# Allegro board project5_3.brd
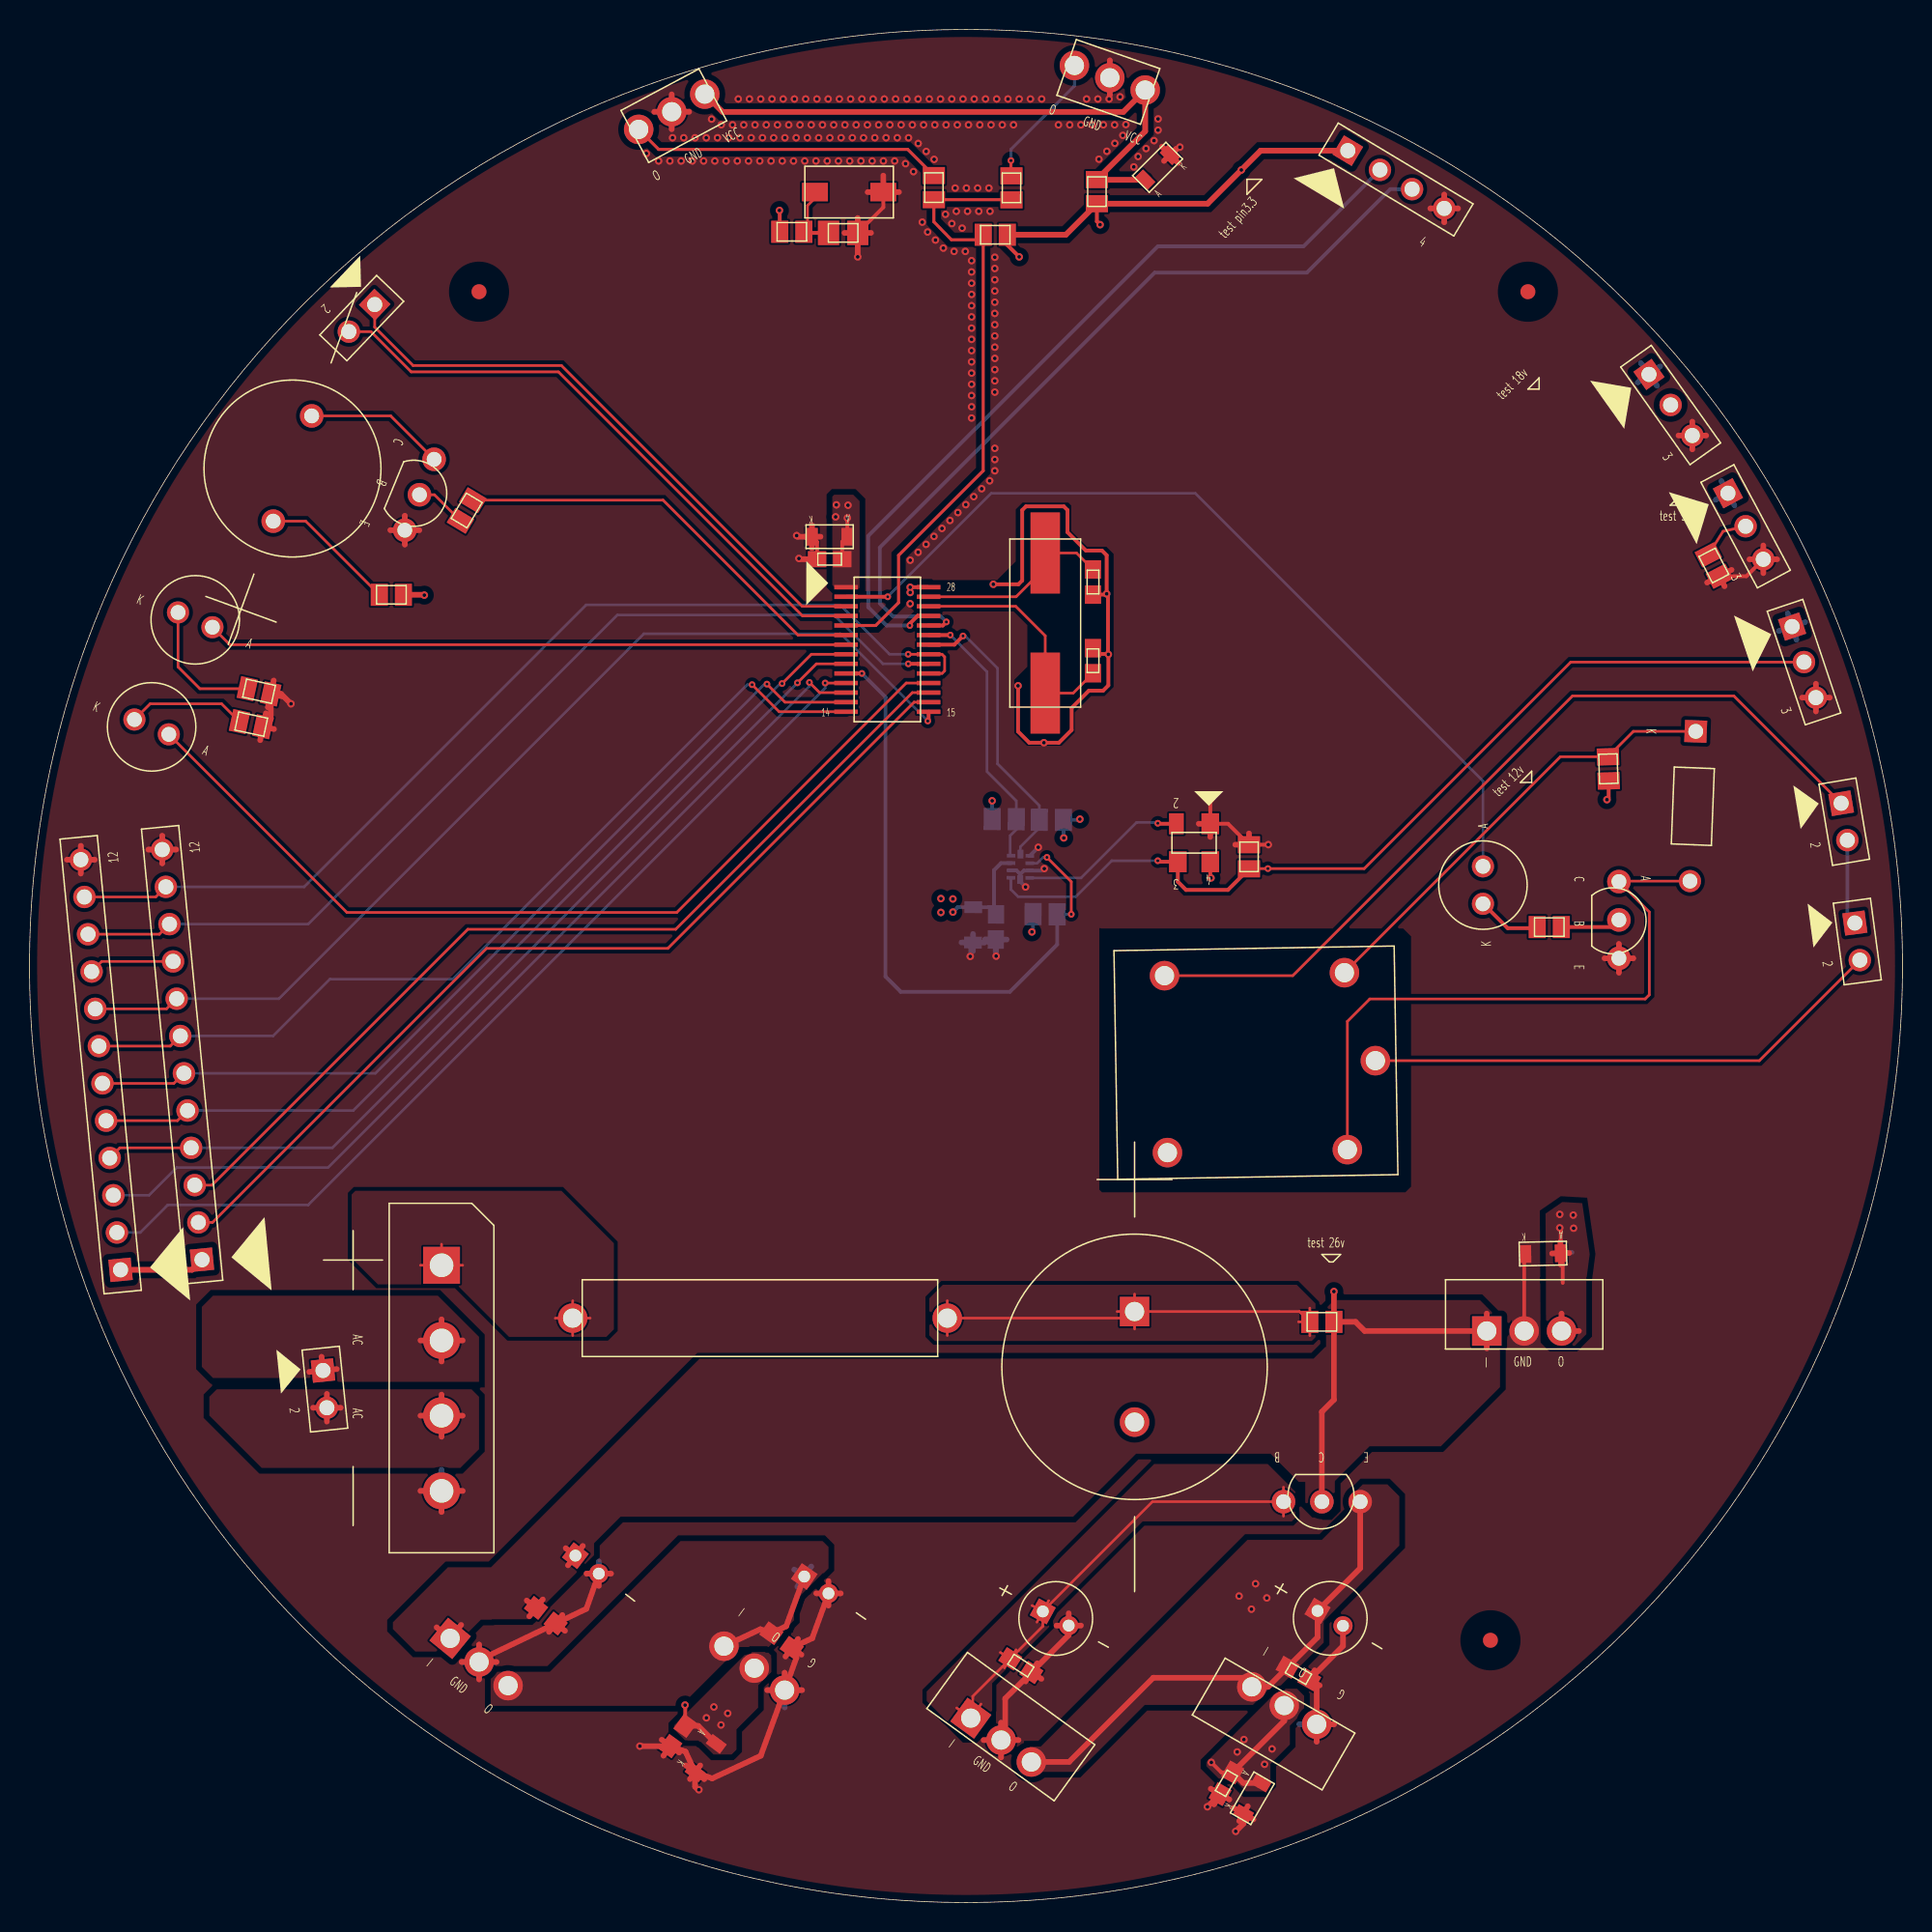
[diagram p0: board, top side]
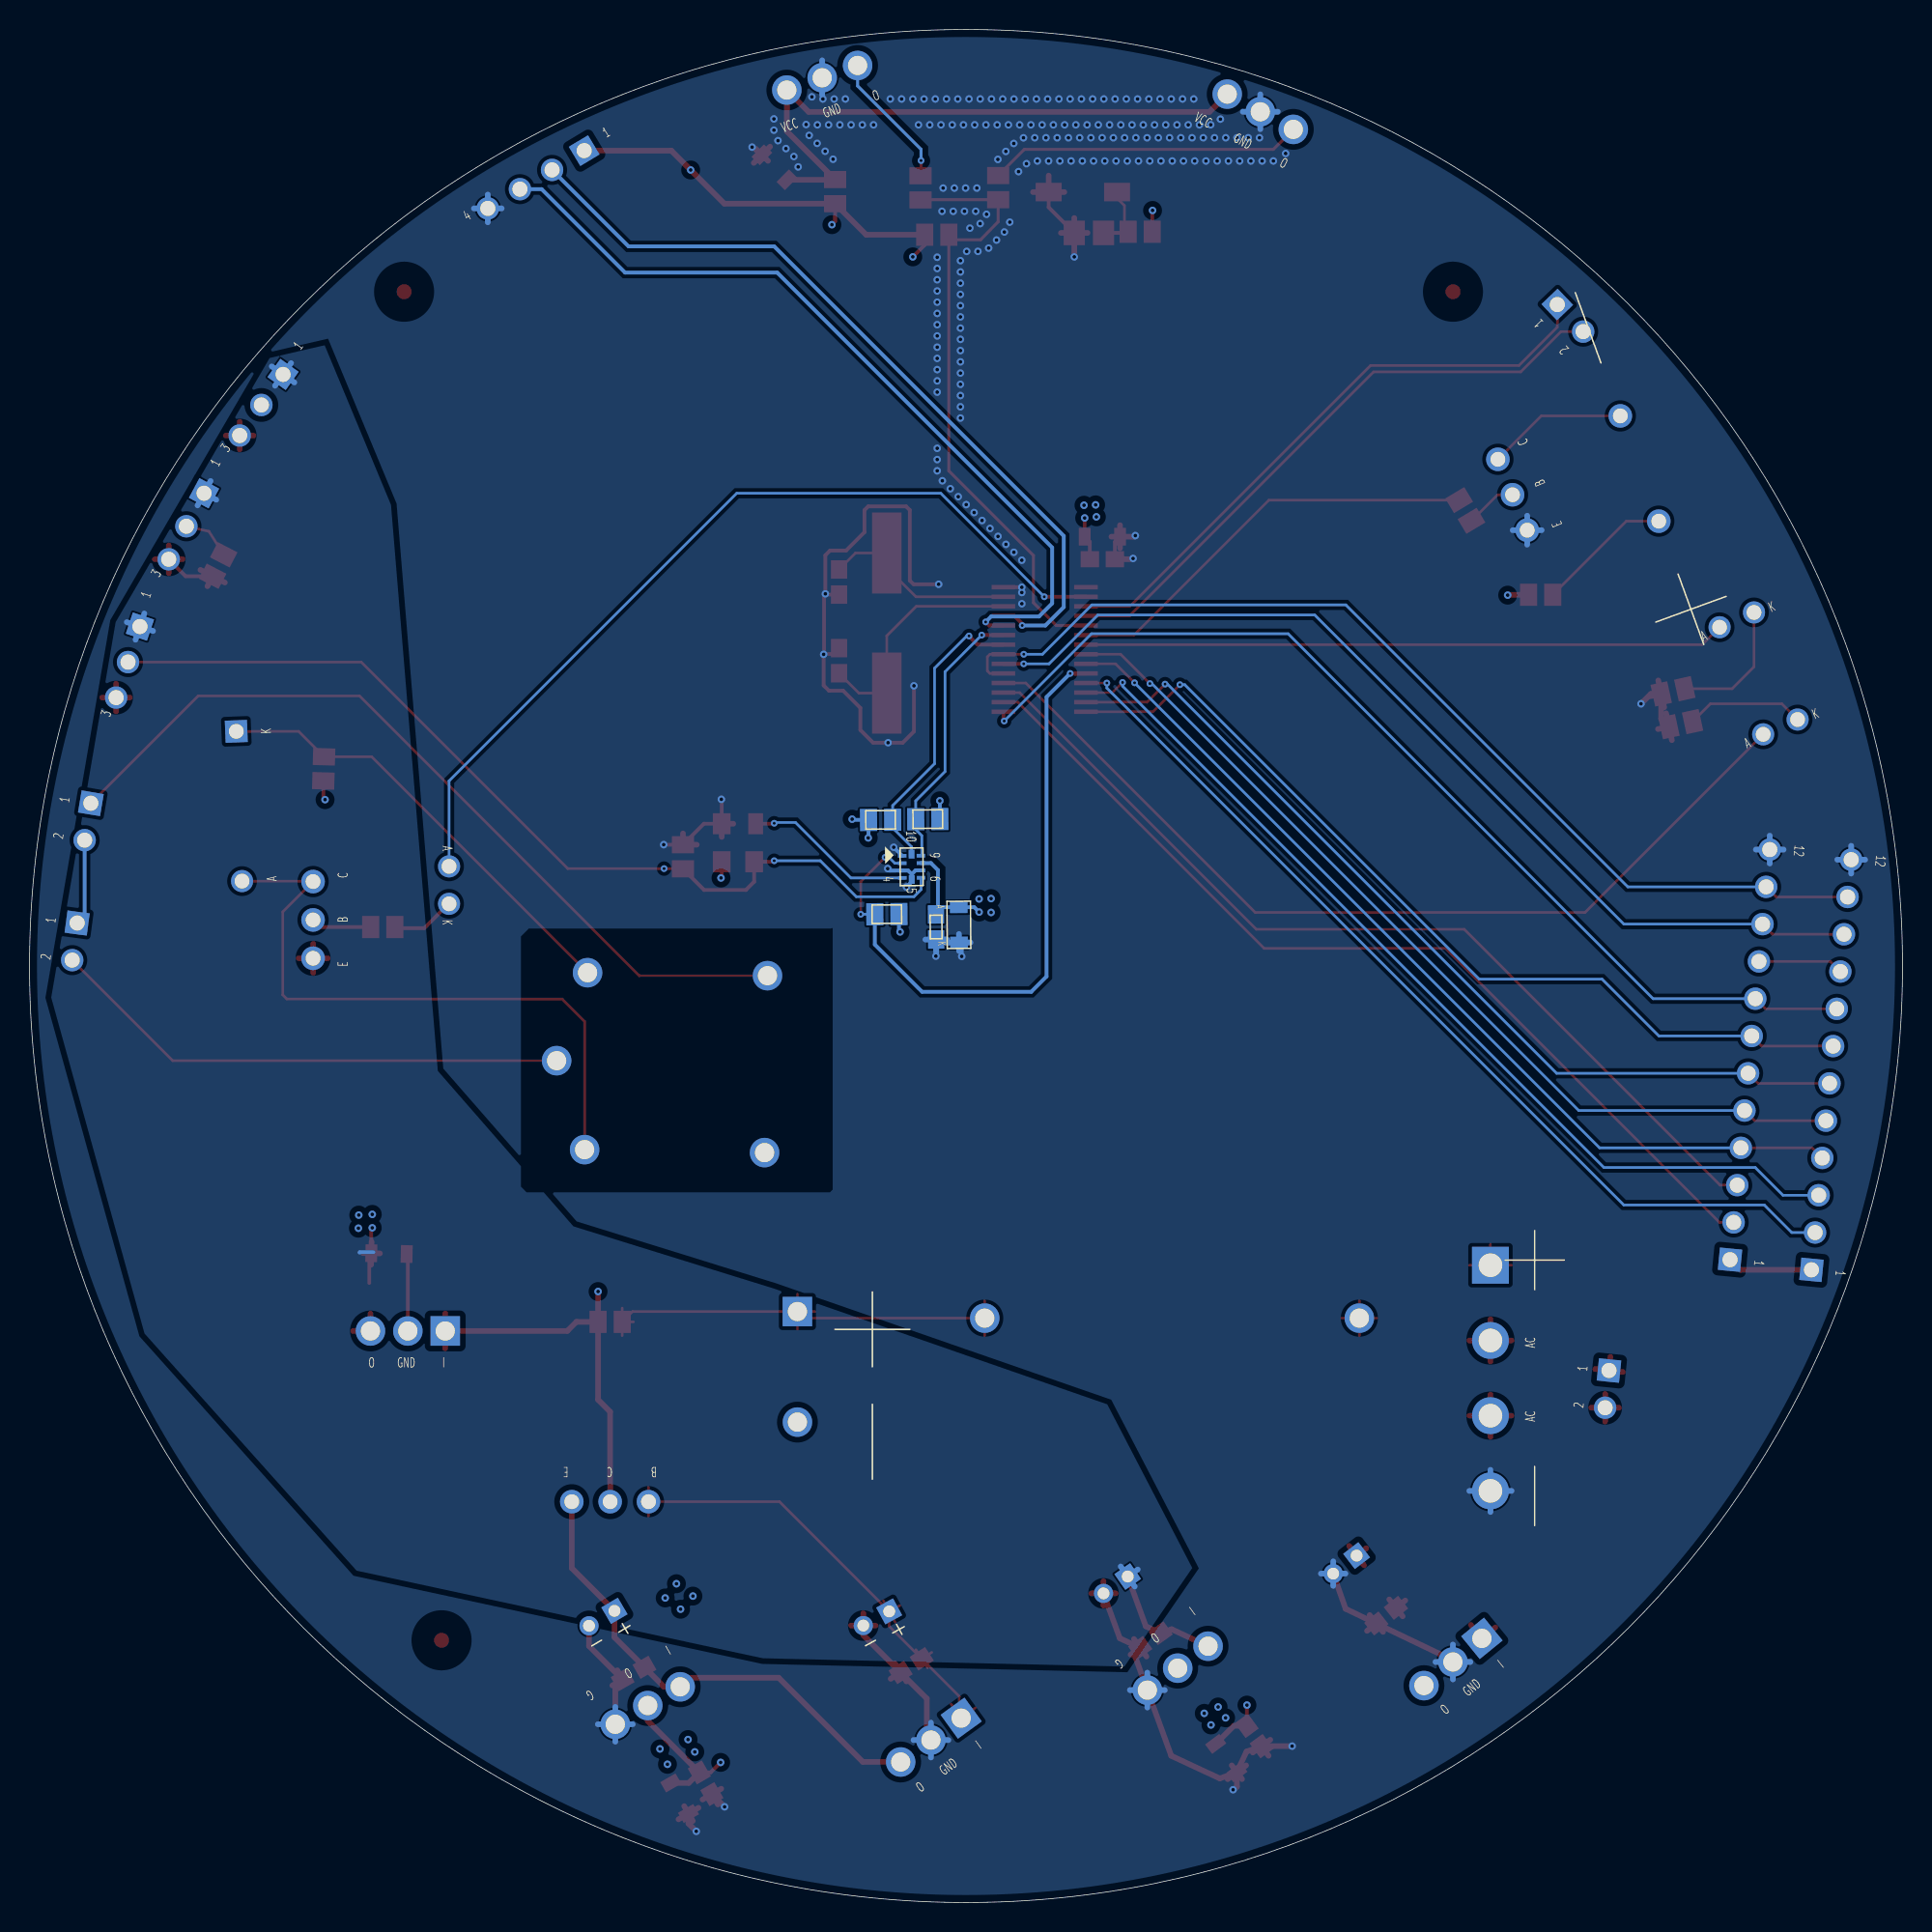
[diagram p1: board, bottom side, seen from below]

Outline 127 x 127 mm; copper layers: TOP, L2_GND, L3_SIG1-PWR, L4_SIG2-PWR, L5_GND, BOTTOM. Coordinates in mm from the lower left corner of the outline.
Outline path: 0,63.5 arc(63.5,127) 127,63.5 arc(63.5,0) 0,63.5

## Design rules (mm)
constraint set DEFAULT: min track width 0.127
net group PWR: nets N04825
net group SENSOR: nets IREMOTE N04873 N04910
net group SIGNAL: nets AIN0 AIN2 ALERT BUZZ LEDA1 LEDA2 LEDB1 LEDB2 N01192 N01643 N01661 N06312 N09730 N09734 N11094 N11141 N11148 N12424 N12443 N12670 N12674 N12827 N12831 N12862 P1.5 P2.5 RELAY RESET RXD SEG_A SEG_B SEG_C SEG_D SEG_E SEG_F SEG_G SEG_H TEST TXD XIN XOUT

## Placement (name value [footprint] x y rotation side)
C1  10uF/16V  [CAP_TANTA_10UF_16V]  63.98 66.29 269.6 bottom
C2  100nF/16V  [C0603]  72.11 84.2 90 top
C3  10uF/16V  [CAP_TANTA_10UF_16V]  54.25 92.61 180 top
C4  100nF/16V  [C0603]  65.53 66.15 269.6 bottom
C5  1nF  [C0805]  55.17 113.21 180 top
C6  100nF/16V  [C0603]  54.25 91.08 180 top
C7  100nF/16V  [C0603]  72.11 89.53 270 top
C8  4.7uF/16V  [CAP_TANTA_10UF_16V]  76.49 117.66 45 top
C9  10uF/16V  [CAP_TANTA_10UF_16V]  102.62 44 181.3 top
C10  10uF/50V  [CAPACITOR_10UF_50V_DIP]  69.59 19.26 331.3 top
C11  100nF/50V  [C0603]  67.22 16.06 327.2 top
C12  10uF/50V  [CAPACITOR_10UF_50V_DIP]  88.2 19.27 329.5 top
C13  100nF/25V  [C0603]  86.04 15.53 330.4 top
C14  10uF/16V  [CAP_TANTA_10UF_16V]  82.92 7.07 240 top
C15  100nF/16V  [C0603]  81.16 8.08 240 top
C16  3300uF/50V  [CAPACITOR_3300UF_50V]  74.93 36.32 270 top
C17  10uF/50V  [CAPACITOR_10UF_50V_DIP]  37.81 22.91 322.4 top
C18  100nF/50V  [C0603]  35.01 19.45 321.5 top
C19  10uF/50V  [CAPACITOR_10UF_50V_DIP]  53.36 21.53 325.1 top
C20  100nF/25V  [C0603]  50.99 17.77 324.5 top
C21  10uF/16V  [CAP_TANTA_10UF_16V]  45.85 9.79 233.2 top
C22  100nF/16V  [C0603]  43.96 11.29 233.9 top
D1  LED  [LED_5MM]  11.24 86.97 336.7 top
D2  LED  [LED_5MM]  8.28 79.71 336.7 top
D3  LED  [LED_5MM]  98.55 68.99 90 top
D4  DIODE  [DIODE_1N4007]  112.78 74.33 267.8 top
D5  KBU1010  [KBU1010G]  27.94 35.56 270 top
F1  FUSE/2.5A  [FUSE2_5A]  49.53 39.62 0 top
FIDUCIAL*  -  [unnamed]  99.06 17.78 0 top
FIDUCIAL*#2  -  [unnamed]  30.48 109.22 0 top
FIDUCIAL*#3  -  [unnamed]  101.6 109.22 0 top
IC1  -  [TSOP1838]  43.69 121.16 28.1 top
IC2  -  [TSOP1838]  73.15 123.44 340.8 top
J1  SPYBIWIRE  [PIN_HEADER_DIP4]  92.66 116.83 329.1 top
J2  POWER  [PIN_HEADER_DIP3]  111.28 101.54 305.4 top
J3  UART  [PIN_HEADER_DIP2]  22.53 107.43 226.3 top
J4  220V-AC  [PIN_HEADER_DIP2]  123.94 65.16 277.6 top
J5  DISPLAY_PORT_1  [PIN_HEADER_DIP12]  4.83 56.8 95.5 top
J6  DISPLAY_PORT_2  [PIN_HEADER_DIP12]  10.35 57.49 95.5 top
J7  UM-18-LEFT  [PIN_HEADER_DIP3]  116.36 93.32 298.1 top
J8  UM-18-RIGHT  [PIN_HEADER_DIP3]  120.32 84.11 288.5 top
J9  220V-AC  [PIN_HEADER_DIP2]  123.05 73.28 279.5 top
J10  18V-AC  [PIN_HEADER_DIP2]  20.03 34.81 275.9 top
LS1  RELAY SPDT  [RL_10A_5V]  83.16 56.95 180.9 top
LS2  -  [SPEAKER]  17.83 97.23 69.9 top
Q1  -  [2N2222]  26.44 95.45 247.5 top
Q2  -  [2N2222]  107.77 66.62 270 top
Q3  PNP BCE  [KSA1013]  87.63 27.18 180 top
R1  47K  [R0805]  51.69 113.28 0 top
R2  10K  [R0805]  66.09 73.46 359.6 bottom
R3  10K  [R0805]  69.29 73.41 179.6 bottom
R4  330R  [R0805]  72.37 116.01 90 top
R5  10K  [R0805]  68.86 67.01 359.6 bottom
R6  10K  [R0805]  65.48 113.08 180 top
R7  0R  [R0805]  66.58 116.26 90 top
R8  330R  [R0805]  15.56 82.13 347.6 top
R9  0R  [R0805]  61.32 116.28 90 top
R10  330R  [R0805]  15.03 79.9 347.8 top
R11  220R  [R0805]  24.54 88.67 180 top
R12  220R  [R0805]  107.05 76.87 271.7 top
R13  200K,1/4W  [R0805]  114.21 90.66 297.4 top
R14  10K  [R0805]  82.69 70.91 90 top
R15  2K2,1/4W  [R0805]  29.64 94.39 239.2 top
R16  330R  [R0805]  103.05 66.14 0 top
R17  2K2,1/4W  [R0805]  87.63 39.37 0 top
SW1  button  [BUTTON_2PIN]  55.58 115.98 0 top
U1  MSP430G2553_28P  [MSP430G2553_28PIN]  58.17 84.96 0 top
U2  ADS1115  [R_PQFP_N10]  67.19 70.23 269.6 bottom
U3  -  [PRTR5V0U2X]  78.96 71.86 180 top
U4  LM7805  [LM78XX]  101.35 39.88 0 top
U5  LM7812  [LM78XX]  66.54 11.93 324.1 top
U6  LM781086  [KTT0003B]  84.36 12.1 150 top
U7  LM7818  [LM78XX]  31.2 17.18 320.8 top
U8  LM781086  [KTT0003B]  48.3 14.72 144.1 top
Y1  -  [CRYSTAL]  68.87 86.75 270 top

## Library data of the parts
C1 C3 C8 = CAP: room: MCU
C2 C4-C7 = CAP NP: room: MCU
C9 C10 C12 C14 C16 C17 C19 C21 = CAP: room: POWER
C11 C13 C15 C18 C20 C22 = CAP NP: room: POWER
D1 D2 = LED: room: MCU
D3 = LED: room: OUTPUT
D4 = DIODE: room: OUTPUT
D5 = KBU1010: room: POWER
F1 = FUSE: room: POWER
IC1 IC2 = TSOP1838: room: MCU
J1 = HEADER 4: room: MCU
J2 = HEADER 3: room: MCU
J3 = HEADER 2: room: MCU
J4 J9 = HEADER 2: room: OUTPUT
J5 J6 = HEADER 12: room: OUTPUT
J7 J8 = HEADER 3: room: OUTPUT
J10 = HEADER 2: room: POWER
LS1 = RELAY SPDT: room: OUTPUT
LS2 = SPEAKER: room: OUTPUT
Q1 Q2 = NPN BCE: room: OUTPUT
Q3 = PNP BCE: room: POWER
R1-R10 = RESISTOR: room: MCU
R11-R16 = RESISTOR: room: OUTPUT
R17 = RESISTOR: room: POWER
SW1 = button: room: MCU
U1 = MSP430G2553_28P: room: MCU
U2 = ADS1115: room: MCU
U3 = PRTR5V0U2X: room: OUTPUT
U4-U8 = LM78XX: room: POWER
Y1 = CRYSTAL: room: MCU

## Footprints (pads in the part's own frame, mm; a bottom-side part is the same pattern mirrored in y, then rotated)
2N2222
  round 1.6 hole 1.001: 1(0,0) 2(-2.601,0) 3(2.601,0)
BUTTON_2PIN
  rect 1.763x1.255 smd: 1(-2.319,0) 2(2.319,0)
C0603
  rect 1.25x1.1 smd: 1(-0.851,0) 2(0.851,0)
C0805
  rect 1.44x1.661 smd: 1(-0.991,0) 2(0.991,0)
CAP_TANTA_10UF_16V
  rect 0.8x1.199 smd: 1(-1.199,0) 2(1.199,0)
CAPACITOR_10UF_50V_DIP
  rect 1.3x1.3 hole 0.8: 1(-1.001,0)
  round 1.3 hole 0.8: 2(1.001,0)
CAPACITOR_3300UF_50V
  rect 1.999x1.999 hole 1.3: 1(-3.749,0)
  round 1.999 hole 1.3: 2(3.749,0)
CRYSTAL
  rect 5.499x1.999 smd: 1(-4.75,0) 2(4.75,0)
DIODE_1N4007
  rect 1.501x1.501 hole 1.001: 1(-5.08,0)
  round 1.501 hole 1.001: 2(5.08,0)
FUSE2_5A
  round 1.999 hole 1.3: 1(-12.7,0) 2(12.7,0)
KBU1010G
  rect 2.499x2.499 hole 1.6: 1(-7.65,0)
  round 2.499 hole 1.6: 2(-2.55,0) 3(2.55,0) 4(7.65,0)
KSA1013
  round 1.6 hole 1.001: 1(2.601,0) 2(0,0) 3(-2.601,0)
KTT0003B
  round 1.999 hole 1.3: 1(2.54,-1.445) 2(-2.54,-1.445) 3(0,-1.445)
LED_5MM
  round 1.501 hole 1.001: 1(-1.27,0) 2(1.27,0)
LM78XX
  rect 1.999x1.999 hole 1.3: 1(-2.535,-1.125)
  round 1.999 hole 1.3: 2(0,-1.125) 3(2.535,-1.125)
MSP430G2553_28PIN
  rect 1.6x0.3 smd: 1(-2.799,4.224) 2(-2.799,3.574) 3(-2.799,2.926) 4(-2.799,2.276) 5(-2.799,1.626) 6(-2.799,0.975) 7(-2.799,0.325) 8(-2.799,-0.325) 9(-2.799,-0.975) 10(-2.799,-1.626) 11(-2.799,-2.276) 12(-2.799,-2.926) 13(-2.799,-3.574) 14(-2.799,-4.224) 15(2.799,-4.224) 16(2.799,-3.574) 17(2.799,-2.926) 18(2.799,-2.276) 19(2.799,-1.626) 20(2.799,-0.975) 21(2.799,-0.325) 22(2.799,0.325) 23(2.799,0.975) 24(2.799,1.626) 25(2.799,2.276) 26(2.799,2.926) 27(2.799,3.574) 28(2.799,4.224)
PIN_HEADER_DIP2
  rect 1.519x1.519 hole 1.021: 1(-1.27,0)
  round 1.519 hole 1.021: 2(1.27,0)
PIN_HEADER_DIP3
  rect 1.519x1.519 hole 1.021: 1(-2.54,0)
  round 1.519 hole 1.021: 2(0,0) 3(2.54,0)
PIN_HEADER_DIP4
  rect 1.519x1.519 hole 1.021: 1(-3.81,0)
  round 1.519 hole 1.021: 2(-1.27,0) 3(1.27,0) 4(3.81,0)
PIN_HEADER_DIP12
  rect 1.519x1.519 hole 1.021: 1(-13.97,0)
  round 1.519 hole 1.021: 2(-11.43,0) 3(-8.89,0) 4(-6.35,0) 5(-3.81,0) 6(-1.27,0) 7(1.27,0) 8(3.81,0) 9(6.35,0) 10(8.89,0) 11(11.43,0) 12(13.97,0)
PRTR5V0U2X
  rect 1.199x1.425 smd: 1(-1.1,-1.288) 3(1.1,1.288) 4(-1.1,1.288)
  rect 1.001x1.425 smd: 2(1.199,-1.288)
R0805
  rect 1.161x1.504 smd: 1(-0.818,0) 2(0.818,0)
R_PQFP_N10
  rect 0.249x0.579 smd: 1(-0.749,-0.635) 2(-0.249,-0.635) 3(0.249,-0.635) 4(0.749,-0.635) 6(0.749,0.635) 7(0.249,0.635) 8(-0.249,0.635) 9(-0.749,0.635)
  rect 0.599x0.399 smd: 5(0.861,0) 10(-0.861,0)
RL_10A_5V
  round 1.999 hole 1.3: 1(-6.101,-5.999) 2(-6.101,5.999) 3(-8.1,0) 4(6.101,-5.999) 5(6.101,5.999)
SPEAKER
  round 1.6 hole 1.001: 1(-3.8,0) 2(3.8,0)
TSOP1838
  round 1.999 hole 1.3: 1(2.54,0.3) 2(0,0.3) 3(-2.54,0.3)
unnamed
  round 1.016 smd: (0,0)

## Nets
+3.3V: C1.1 C3.1 C4.1 C6.1 C14.1 C15.1 C21.1 C22.1 J1.1 R1.1 R2.1 R3.1 R4.1 R5.1 R6.1 U1.1 U2.8(VDD) U3.4(VCC) U6.3(VOUT) U8.3(VOUT)
+5V: C9.1 J2.2 U4.3(VOUT)
+12V: C12.1 C13.1 J5.1 J6.1 Q3.3(E) R11.1 R12.2 U5.3(VOUT) U6.1
+18V: C19.1 C20.1 J2.1 J7.1 J8.1 U7.3(VOUT) U8.1
+26V: C17.1 C18.1 Q3.2 R17.2 U4.1 U7.1
GND: C1.2 C2.2 C3.2 C4.2 C5.1 C6.2 C7.2 C8.2 C9.2 C10.2 C11.2 C12.2 C13.2 C14.2 C15.2 C16.2 C17.2 C18.2 C19.2 C20.2 C21.2 C22.2 D5.4 IC1.2 IC2.2 J1.4 J2.3 J5.12 J6.12 J7.3 J8.3 Q1.3(E) Q2.3(E) R8.2 R10.2 R13.2 R14.2 SW1.2 U1.28 U2.1 U2.3 U2.5 U2.7 U3.1 U4.2 U5.2 U6.2 U7.2 U8.2
AIN0: U2.4 U3.2
AIN2: J8.2 R14.1 U2.6 U3.3
ALERT: R5.2 U1.10 U2.2
BUZZ: R15.1 U1.6
IREMOTE: R6.2 R7.1 R9.1 U1.5
LEDA1: J5.2 U1.11
LEDA2: J5.3 U1.12
LEDB1: J6.2 U1.16
LEDB2: J6.3 U1.17
P1.5: D1.2 U1.7
P2.5: D2.2 U1.18
RELAY: D3.2 U1.2
RESET: J1.3 U1.24
RXD: J3.1 U1.3
SEG_A: J5.4 J6.4 U1.9
SEG_B: J5.5 J6.5 U1.8
SEG_C: J5.6 J6.6 U1.13
SEG_D: J5.7 J6.7 U1.14
SEG_E: J5.8 J6.8 U1.15
SEG_F: J5.9 J6.9
SEG_G: J5.10 J6.10 U1.20
SEG_H: J5.11 J6.11 U1.19 U1.21
TEST: J1.2 U1.25
TXD: J3.2 U1.4
XIN: C7.1 U1.27 Y1.1
XOUT: C2.1 U1.26(XOUT) Y1.2
N01192: C5.2 R1.2 SW1.1
N01643: R2.2 U1.23 U2.9
N01661: R3.2 U1.22 U2.10
N04825: C8.1 IC1.1(VCC) IC2.1(VCC) R4.2
N04873: IC2.3 R7.2
N04910: IC1.3 R9.2
N06312: J7.2 R13.1
N09730: D1.1(CATHODE) R8.1
N09734: D2.1(CATHODE) R10.1
N11094: LS2.1 R11.2
N11141: LS2.2 Q1.2
N11148: Q1.1 R15.2
N12424: D3.1(CATHODE) R16.1
N12443: Q2.1 R16.2
N12670: D4.2 LS1.2 Q2.2
N12674: D4.1(K) LS1.1 R12.1
N12827: J4.1 J9.2
N12831: J9.1 LS1.4(NO)
N12862: J4.2 LS1.3
N19176: D5.2(AC) J10.1
N19183: D5.3 J10.2
N19215: D5.1 F1.1
N21283: C16.1 F1.2 R17.1
N21515: C10.1 C11.1 Q3.1 U5.1

Pads without a net: LS1 5

## Via types
v1: diameter 0.457, hole 0.203, TOP to BOTTOM, 21 vias
v2: diameter 0.508, hole 0.254, TOP to BOTTOM, 248 vias

## Routing (per net, layer and track width the routed paths; a pad name or vN(x,y) marks a point on that pad's centre or on a via; arc(x,y) is an arc through that point)
+3.3V: length 63.4
  TOP w0.254: v2(80.14,9.5) 80.82,8.82 81.58,8.82 ; v2(72.59,113.77) 72.37,113.99 R4.1 ; v2(50.85,114.73) 50.87,114.71 R1.1 ; v2(80.11,69.47) 80.06,69.52 U3.4 ; R6.1 66.3,112.39 v2(67.11,111.58) ; 44.46,11.98 44.46,13.37 v2(44.45,13.39) ; v2(55.45,93.88) C3.1 55.11,92.26 C6.1
  TOP w0.381: 46.57,10.75 45.34,11.98 44.46,11.98 ; U6.3 85.08,12.32 81.58,8.82 82.3,8.11 C14.1 ; R6.1 70.27,113.08 R4.1 79.88,115.19 v2(82.17,117.48) 83.48,118.79 89.39,118.79
  L3_SIG1-PWR w0.381: 88.91,117.98 89.39,118.79 ; 89.39,118.79 90.19,118.3 ; 89.39,118.79 88.58,119.27
  BOTTOM w0.254: R5.1 68.05,65.89 v2(67.97,65.81) ; 65.41,67.13 65.05,67.49 62.94,67.49 v2(62.61,67.16) ; 65.41,67.13 C4.1 ; 65.41,67.13 65.41,70 65.88,70.48 66.55,70.48 ; v2(71.22,73.46) 71.17,73.41 70.11,73.41 70.11,72.21 v2(70.13,72.19) ; R2.1 v2(65.27,74.7)
  vias: v2(45.9,12.52) v2(46.41,13.26) v2(46.89,12.04) v2(47.35,12.83) v2(54.71,94.77) v2(54.66,93.95) v2(55.5,94.74) v2(61.8,68.07) v2(61.8,67.13) v2(62.61,68.05) v2(81.89,10.21) v2(82.35,11.05) v2(83.74,9.37) v2(84.25,10.41)
+5V: length 12.7
  TOP w0.254: v2(103.76,45.75) 103.82,45.68 103.82,44.02 103.96,43.88 103.96,42.01
  TOP w0.381: 105.06,38.75 U4.3 103.88,39.93 ; 103.82,44.02 104.4,44.04 ; 103.82,44.02 103.8,44.8 ; 103.82,44.02 103.84,43.24 ; 103.82,44.02 103.24,44.01
  L3_SIG1-PWR w0.381: 110.34,101.54 J2.2 ; J2.2 111.28,102.48 ; J2.2 111.28,100.6 ; J2.2 112.22,101.54
  vias: v2(103.76,46.66) v2(104.67,46.61) v2(104.7,45.72)
+12V: length 53.4
  TOP w0.254: R12.2 107.08,74.89 v2(106.96,74.78)
  TOP w0.381: 68.36,9.54 70.5,9.54 76.2,15.24 82.26,15.24 82.88,14.63 83.98,14.63 87.34,17.98 87.34,19.78 90.23,22.67 Q3.3 ; 6.17,42.9 11.01,42.9 11.69,43.59 ; R11.1 26.75,88.67 v2(26.77,88.65)
  L4_SIG2-PWR w0.381: 10.76,43.49 11.69,43.59 ; 11.69,43.59 11.79,42.65 ; 11.69,43.59 12.63,43.68 ; 11.69,43.59 11.6,44.52 ; 5.24,42.81 6.17,42.9 ; 6.17,42.9 7.11,42.99 ; 6.17,42.9 6.26,41.97 ; 6.17,42.9 6.08,43.84 ; Q3.3 90.23,28.16 ; Q3.3 89.25,27.18 ; Q3.3 90.23,26.2 ; Q3.3 91.21,27.18
  vias: v2(82.02,20.78) v2(82.85,19.89) v2(83.13,21.62) v2(83.9,20.65)
+18V: length 22
  TOP w0.381: 52.53,22.1 51.31,18.73 50.3,18.26 49.56,18.53 U8.1
  BOTTOM w0.254: 103.68,44.09 104.6,44.09 104.62,44.07
  BOTTOM w0.381: 115.16,95.56 115.61,94.73 ; 115.16,95.56 114.34,95.12 ; 115.16,95.56 114.72,96.39 ; 52.53,22.1 53.01,22.78 ; 52.53,22.1 52.06,21.42 ; 52.53,22.1 51.85,22.58 ; 119.21,87.41 J8.1 ; J8.1 119.81,85.62 ; J8.1 118.62,86.22 ; J8.1 120.4,86.81 ; 109.81,103.61 110.35,102.84 ; 109.81,103.61 110.57,104.16 ; 109.81,103.61 109.04,103.07 ; 109.81,103.61 109.26,104.38
+26V: length 34.7
  TOP w0.381: 33.89,19.41 34.35,19.98 ; 34.35,19.98 33.72,20.48 ; 34.35,19.98 34.8,20.55 ; Q3.2 87.63,33.27 88.45,34.09 R17.2 ; U4.1 98.81,39.93 ; U4.1 90.53,38.75 89.92,39.37 R17.2 ; U4.1 98.81,37.57 ; R17.2 v2(88.45,41.43) ; C17.1 37.52,24.18 ; C17.1 36.36,24.03 ; C17.1 36.51,22.86 ; 29.27,18.82 28.52,17.91 27.61,18.66
GND: length 478.7
  TOP w0.254: C3.2 53.4,92.26 C6.2 53.06,91.08 ; U1.28 59.72,89.19 v2(59.72,89.18) ; 73.13,84.66 v2(73.15,84.63) 73.15,82.52 72.8,82.17 71.83,82.17 70.66,81 70.66,79.5 69.8,78.64 v2(68.78,78.64) 67.79,78.64 67.03,79.4 v2(67.03,82.5) ; 73.13,84.66 73.13,88.65 73.09,88.68 ; 73.13,84.66 72.5,84.66 C2.2 ; SW1.2 57.89,114.94 C5.1 ; v2(80.09,74.8) 80.06,74.78 U3.1 81.27,73.14 R14.2 83.99,71.72 v2(84,71.73) ; 73.09,88.68 v2(73.04,88.73) 73.04,91.35 72.72,91.67 71.63,91.67 70.38,92.91 70.38,94.41 70.13,94.67 67.56,94.67 67.31,94.41 67.31,89.64 67.06,89.38 v2(65.35,89.38) ; 73.09,88.68 C7.2 ; C8.2 77.48,118.5 v2(78,119.02) ; 101.42,43.97 101.35,43.89 U4.2 ; 114.58,89.93 116.41,89.93 J7.3
  TOP w0.381: 67.54,14.99 67.93,15.6 ; 67.93,15.6 68.61,15.17 ; 67.93,15.6 68.33,16.22 ; 67.93,15.6 66.16,13.83 66.16,10.79 ; 67.93,15.6 70.46,18.14 70.46,18.78 ; 86.78,15.11 87.14,15.75 ; 86.78,15.11 89.06,17.39 89.06,18.76 ; 86.78,15.11 87.28,14.61 U6.2 ; 86.78,15.11 87.48,14.71 ; 53.06,91.83 C3.2 ; C3.2 53.64,92.61 ; C3.2 53.06,93.39 ; C3.2 52.1,92.61 v2(52.02,92.68) ; 54.18,20.96 53.07,17.92 51.69,17.27 ; v2(81.79,4.83) 82.32,5.35 C14.2 ; 111.81,99.47 112.75,99.47 ; 112.75,99.47 113.69,99.47 ; 112.75,99.47 112.75,100.41 ; 112.75,99.47 112.75,98.53 ; 116.62,91.08 J7.3 ; J7.3 117.56,90.14 ; J7.3 118.5,91.08 ; J7.3 117.56,92.02 ; 27.94,26.48 D5.4 ; D5.4 26.51,27.91 ; D5.4 29.37,27.91 ; C14.2 82.61,6.53 ; C14.2 81.64,6.42 ; C14.2 82.99,5.64 ; C14.2 82.02,5.53 ; 73.25,124.91 IC2.2 73.25,122.54 ; R8.2 16.36,80.25 15.83,79.73 ; R8.2 16.56,82.86 ; R8.2 17.1,81.79 ; R8.2 16.16,81.04 ; R8.2 17.06,81.95 v2(17.73,81.28) ; C5.1 v2(56.16,111.58) ; C5.1 57.06,113.21 ; C5.1 56.16,114.22 ; C5.1 55.26,113.21 ; 56.83,115.98 SW1.2 ; SW1.2 58.96,115.98 ; SW1.2 57.89,117.09 ; 79.28,73.14 U3.1 80.06,72.25 ; 29.3,16.31 U7.2 ; U7.2 30.49,17.49 ; U7.2 30.54,16.46 35.68,18.92 37.76,19.92 C17.2 ; U7.2 31.67,16.31 ; U7.2 30.49,15.13 ; 80.1,7.71 80.73,7.35 ; 80.73,7.35 81.36,6.98 ; 80.73,7.35 80.32,6.65 ; 80.73,7.35 v2(79.87,6.49) ; 25.45,93.05 26.43,93.05 ; 25.45,93.05 25.45,92.07 ; 25.45,93.05 24.47,93.05 ; 25.45,93.05 25.45,94.03 ; 43.55,121.42 43.55,122.6 ; 43.55,121.42 44.73,121.42 ; 43.55,121.42 42.36,121.42 ; 43.55,121.42 43.55,120.24 ; 8.06,71.39 J6.12 ; J6.12 9.94,71.39 ; J6.12 9,70.45 ; J6.12 9,72.33 ; 35.68,18.92 36.31,18.42 ; 35.68,18.92 36.13,19.49 ; 35.68,18.92 35.22,18.35 ; 53.06,91.08 52.22,91.08 v2(52.17,91.14) ; 65.88,11.01 65.88,12.19 ; 65.88,11.01 67.06,11.01 ; 65.88,11.01 65.88,9.83 ; 65.88,11.01 64.7,11.01 ; 38.6,21.47 C17.2 ; C17.2 37.77,22.3 ; C17.2 39.43,22.3 ; C22.2 44.05,10.17 ; C22.2 v2(41.39,10.6) ; C22.2 44.48,10.23 45.13,8.83 46.29,8.41 49.58,9.95 51.2,14.4 52,16.6 51.69,17.27 ; C22.2 42.99,9.95 ; C22.2 42.87,11.03 ; 44.78,8.37 C21.2 ; C21.2 45.48,9.3 ; C21.2 44.51,9.3 ; C21.2 45.76,8.36 ; C21.2 45.13,7.85 45.34,7.65 v2(45.39,7.65) ; C8.2 77.89,117.95 ; C8.2 76.79,119.05 ; C8.2 77.75,118.92 ; C8.2 76.93,118.09 ; 51.26,16.68 51.69,17.27 ; 51.69,17.27 52.34,16.8 ; 51.69,17.27 52.11,17.87 ; J5.12 4.42,70.71 ; J5.12 3.48,71.65 ; J5.12 2.54,70.71 ; J5.12 3.48,69.77 ; 69.63,18.78 70.46,18.78 ; 70.46,18.78 71.3,18.78 ; 70.46,18.78 70.46,19.61 ; 82.69,72.49 R14.2 81.76,71.72 ; 120.19,81.7 J8.3 ; J8.3 122.07,81.7 ; J8.3 121.13,80.76 ; J8.3 121.13,82.64 ; 106.79,64.02 Q2.3 ; Q2.3 107.77,63.04 ; Q2.3 107.77,65 ; Q2.3 108.75,64.02 ; 114.58,89.93 115.41,90.36 ; 114.58,89.93 113.75,89.5 ; 114.58,89.93 114.93,89.25 ; U8.2 52.38,14.4 ; U8.2 51.2,15.58 ; U8.2 50.02,14.4 ; 94.99,114.87 J1.4 ; J1.4 95.93,115.81 ; J1.4 95.93,113.93 ; J1.4 96.87,114.87 ; 15.64,78.81 15.83,79.73 ; 15.83,79.73 16.03,80.64 ; 15.83,79.73 16.58,79.57 ; 53.35,20.96 54.18,20.96 ; 54.18,20.96 54.18,21.79 ; 54.18,20.96 55.01,20.96 ; 54.18,20.96 54.18,20.13 ; U6.2 88.46,12.09 ; U6.2 87.28,10.9
  L3_SIG1-PWR w0.381: J6.12 9,72.33 ; J6.12 9,70.45 ; J6.12 9.94,71.39 ; J6.12 8.06,71.39 ; 117.56,90.14 J7.3 ; J7.3 117.56,92.02 ; J7.3 118.5,91.08 ; J7.3 116.62,91.08 ; J5.12 4.42,70.71 ; J5.12 3.48,71.65 ; J5.12 3.48,69.77 ; J5.12 2.54,70.71 ; 89.06,18.76 89.89,18.76 ; 89.06,18.76 89.06,19.59 ; 89.06,18.76 88.23,18.76 ; 89.06,18.76 89.06,17.93 ; 38.6,21.47 C17.2 ; C17.2 38.6,23.13 ; C17.2 37.77,22.3 ; C17.2 39.43,22.3 ; 24.47,93.05 25.45,93.05 ; 25.45,93.05 25.45,92.07 ; 25.45,93.05 26.43,93.05 ; 25.45,93.05 25.45,94.03 ; 29.3,16.31 U7.2 ; U7.2 30.49,15.13 ; U7.2 30.49,17.49 ; U7.2 31.67,16.31 ; D5.4 29.37,27.91 ; D5.4 27.94,29.34 ; D5.4 27.94,26.48 ; D5.4 26.51,27.91 ; 73.25,124.91 IC2.2 73.25,122.54 ; U6.2 87.28,13.27 ; U6.2 86.1,12.09 ; U6.2 88.46,12.09 ; U6.2 87.28,10.9 ; 94.99,114.87 J1.4 ; J1.4 95.93,115.81 ; J1.4 96.87,114.87 ; J1.4 95.93,113.93 ; 121.13,80.76 J8.3 ; J8.3 121.13,82.64 ; J8.3 122.07,81.7 ; J8.3 120.19,81.7 ; 43.55,121.42 43.55,122.6 ; 43.55,121.42 43.55,120.24 ; 43.55,121.42 42.36,121.42 ; 43.55,121.42 44.73,121.42 ; 76.11,32.57 C16.2 74.93,31.39 ; 101.35,39.93 U4.2 101.35,37.57 ; 112.75,99.47 113.69,99.47 ; 112.75,99.47 112.75,100.41 ; 112.75,99.47 112.75,98.53
  L4_SIG2-PWR w0.381: 8.06,71.39 J6.12 ; J8.3 122.07,81.7 ; J8.3 121.13,82.64 ; J8.3 120.19,81.7 ; J8.3 121.13,80.76 ; 89.06,17.93 89.06,18.76 ; 89.06,18.76 89.89,18.76 ; 89.06,18.76 88.23,18.76 ; 89.06,18.76 89.06,19.59 ; 117.56,90.14 J7.3 ; J7.3 118.5,91.08 ; J7.3 116.62,91.08 ; J7.3 117.56,92.02 ; 51.2,13.22 U8.2 ; U8.2 50.02,14.4 ; U8.2 52.38,14.4 ; U8.2 51.2,15.58 ; 42.36,121.42 43.55,121.42 ; 43.55,121.42 43.55,120.24 ; 43.55,121.42 43.55,122.6 ; 43.55,121.42 44.73,121.42 ; U7.2 30.49,17.49 ; U7.2 31.67,16.31 ; U7.2 29.3,16.31 ; U7.2 30.49,15.13 ; 112.75,98.53 112.75,99.47 ; 112.75,99.47 111.81,99.47 ; 112.75,99.47 113.69,99.47 ; 112.75,99.47 112.75,100.41 ; J5.12 3.48,71.65 ; J5.12 2.54,70.71 ; J5.12 3.48,69.77 ; J5.12 4.42,70.71 ; J1.4 96.87,114.87 ; J1.4 94.99,114.87 ; J1.4 95.93,113.93 ; J1.4 95.93,115.81 ; 65.88,11.01 67.06,11.01 ; 65.88,11.01 64.7,11.01 ; 65.88,11.01 65.88,12.19 ; 65.88,11.01 65.88,9.83 ; U6.2 88.46,12.09 ; U6.2 87.28,13.27 ; U6.2 87.28,10.9 ; U6.2 86.1,12.09 ; 73.25,122.54 IC2.2 73.25,124.91 ; 70.46,17.95 70.46,18.78
  L5_GND w0.381: 120.19,81.7 J8.3 ; J8.3 122.07,81.7 ; J8.3 121.13,82.64 ; J8.3 121.13,80.76 ; 70.46,17.95 70.46,18.78 ; 70.46,18.78 71.3,18.78 ; 70.46,18.78 69.63,18.78 ; 70.46,18.78 70.46,19.61 ; 88.23,18.76 89.06,18.76 ; 89.06,18.76 89.89,18.76 ; 89.06,18.76 89.06,17.93 ; 89.06,18.76 89.06,19.59 ; D5.4 27.94,29.34 ; D5.4 27.94,26.48 ; D5.4 29.37,27.91 ; D5.4 26.51,27.91 ; 95.93,113.93 J1.4 ; J1.4 96.87,114.87 ; J1.4 95.93,115.81 ; J1.4 94.99,114.87 ; U7.2 30.49,17.49 ; U7.2 29.3,16.31 ; U7.2 31.67,16.31 ; U7.2 30.49,15.13 ; 8.06,71.39 J6.12 ; J6.12 9,70.45 ; J6.12 9.94,71.39 ; J6.12 9,72.33 ; 50.02,14.4 U8.2 ; U8.2 51.2,15.58 ; U8.2 51.2,13.22 ; U8.2 52.38,14.4 ; 2.54,70.71 J5.12 ; J5.12 4.42,70.71 ; J5.12 3.48,71.65 ; J5.12 3.48,69.77 ; 43.55,120.24 43.55,121.42 ; 43.55,121.42 43.55,122.6 ; 43.55,121.42 44.73,121.42 ; 43.55,121.42 42.36,121.42 ; 74.93,31.39 C16.2 ; C16.2 76.11,32.57 ; C16.2 73.75,32.57 ; C16.2 74.93,33.75 ; 112.75,99.47 113.69,99.47 ; 112.75,99.47 111.81,99.47 ; 112.75,99.47 112.75,100.41 ; 112.75,99.47 112.75,98.53 ; 106.79,64.02 Q2.3 ; Q2.3 108.75,64.02 ; Q2.3 107.77,63.04 ; Q2.3 107.77,65 ; 73.25,124.91 IC2.2 73.25,122.54 ; J7.3 117.56,92.02 ; J7.3 118.5,91.08 ; J7.3 117.56,90.14 ; J7.3 116.62,91.08 ; 54.18,20.13 54.18,20.96 ; 54.18,20.96 54.18,21.79 ; 54.18,20.96 55.01,20.96 ; 54.18,20.96 53.35,20.96 ; 38.6,21.47 C17.2 ; C17.2 38.6,23.13 ; C17.2 37.77,22.3 ; C17.2 39.43,22.3 ; 101.35,39.93 U4.2 101.35,37.57 ; U6.2 88.46,12.09 ; U6.2 86.1,12.09 ; U6.2 87.28,10.9 ; U6.2 87.28,13.27 ; 25.45,93.05 26.43,93.05 ; 25.45,93.05 24.47,93.05 ; 25.45,93.05 25.45,92.07 ; 25.45,93.05 25.45,94.03
  BOTTOM w0.254: 67.18,69.73 67.18,69.22 v2(67.54,68.86) ; 67.18,69.73 67.42,69.97 68.68,69.97 v2(68.81,70.1) ; 67.18,69.73 66.92,69.98 66.55,69.98 ; v2(63.79,64.15) 63.79,64.91 C1.2 65.32,65.09 65.52,65.3 65.52,64.96 65.52,64.95 ; v2(68.4,71.55) 67.83,70.98 67.83,70.97
  BOTTOM w0.381: 3.48,69.77 J5.12 ; J5.12 4.42,70.71 ; J5.12 3.48,71.65 ; J5.12 2.54,70.71 ; 26.51,27.91 D5.4 ; D5.4 27.94,26.48 ; D5.4 29.37,27.91 ; D5.4 27.94,29.34 ; C17.2 38.6,23.13 ; C17.2 39.43,22.3 ; C17.2 37.77,22.3 ; C17.2 38.6,21.47 ; 95.93,113.93 J1.4 ; J1.4 94.99,114.87 ; J1.4 95.93,115.81 ; J1.4 96.87,114.87 ; 25.45,93.05 25.45,94.03 ; 25.45,93.05 25.45,92.07 ; 25.45,93.05 24.47,93.05 ; 25.45,93.05 26.43,93.05 ; 50.02,14.4 U8.2 ; U8.2 52.38,14.4 ; U8.2 51.2,15.58 ; U8.2 51.2,13.22 ; 63.19,65.1 C1.2 ; C1.2 63.97,64.51 ; C1.2 64.75,65.08 ; C1.2 63.98,65.67 ; J6.12 9,72.33 ; J6.12 8.06,71.39 ; J6.12 9,70.45 ; J6.12 9.94,71.39 ; 73.25,124.91 IC2.2 73.25,122.54 ; U6.2 88.46,12.09 ; U6.2 87.28,13.27 ; U6.2 87.28,10.9 ; U6.2 86.1,12.09 ; U7.2 31.67,16.31 ; U7.2 29.3,16.31 ; U7.2 30.49,17.49 ; U7.2 30.49,15.13 ; 64.79,65.3 65.52,65.3 ; 65.52,65.3 66.26,65.29 ; 65.52,65.3 65.52,64.49 ; 65.88,11.01 65.88,12.19 ; 65.88,11.01 67.06,11.01 ; 65.88,11.01 64.7,11.01 ; 65.88,11.01 65.88,9.83 ; 42.36,121.42 43.55,121.42 ; 43.55,121.42 43.55,120.24 ; 43.55,121.42 44.73,121.42 ; 43.55,121.42 43.55,122.6 ; 65.52,64.95 65.52,64.19 v2(65.54,64.17)
  vias: v2(41.83,118.59) v2(42.66,118.08) v2(43.42,118.08) v2(43.6,119.66) v2(44.18,118.08) v2(44.36,119.66) v2(44.95,118.08) v2(45.13,119.66) v2(45.71,118.08) v2(45.89,119.66) v2(46.25,120.92) v2(46.47,118.08) v2(46.65,119.66) v2(46.91,120.54) v2(47.23,118.08) v2(47.41,119.66) v2(47.67,120.54) v2(47.99,118.08) v2(48.06,122.29) v2(48.17,119.66) v2(48.43,120.54) v2(48.82,122.29) v2(48.76,118.08) v2(48.94,119.66) v2(49.19,120.54) v2(49.52,118.08) v2(49.58,122.29) v2(49.7,119.66) v2(49.96,120.54) v2(50.28,118.08) v2(50.34,122.29) v2(50.46,119.66) v2(50.72,120.54) v2(51.1,122.29) v2(51.04,118.08) v2(51.22,119.66) v2(51.48,120.54) v2(51.8,118.08) v2(51.87,122.29) v2(51.98,119.66) v2(52.24,120.54) v2(52.57,118.08) v2(52.63,122.29) v2(52.75,119.66) v2(53,120.54) v2(53.39,122.29) v2(53.33,118.08) v2(53.51,119.66) v2(53.77,120.54) v2(54.09,118.08) v2(54.15,122.29) v2(54.27,119.66) v2(54.53,120.54) v2(54.91,122.29) v2(54.85,118.08) v2(55.03,119.66) v2(55.29,120.54) v2(55.61,118.08) v2(55.68,122.29) v2(55.79,119.66) v2(56.05,120.54) v2(56.38,118.08) v2(56.44,122.29) v2(56.56,119.66) v2(56.81,120.54) v2(57.2,122.29) v2(57.14,118.08) v2(57.32,119.66) v2(57.58,120.54) v2(57.9,118.08) v2(57.96,122.29) v2(58.08,119.66) v2(58.34,120.54) v2(58.66,118.08) v2(58.72,122.29) v2(58.84,119.66) v2(59.1,120.54) v2(59.4,117.9) v2(59.49,122.29) v2(59.6,119.66) v2(59.72,91.01) v2(59.72,88.83) v2(59.71,88.06) v2(59.86,120.54) v2(59.94,117.36) v2(60.25,122.29) v2(60.26,119.27) v2(60.25,91.55) v2(60.53,113.94) v2(60.62,120.54) v2(60.8,118.73) v2(60.79,92.09) v2(60.9,113.27) v2(61.01,122.29) v2(61.39,120.54) v2(61.34,118.19) v2(61.33,92.63) v2(61.43,112.72) v2(61.77,122.29) v2(61.87,93.17) v2(61.96,112.18) v2(62.11,114.47) v2(62.15,120.54) v2(62.41,93.71) v2(62.53,122.29) v2(62.54,113.84) v2(62.69,111.96) v2(62.77,116.25) v2(62.91,120.54) v2(62.84,114.67) v2(62.95,94.25) v2(63.3,122.29) v2(63.24,113.53) v2(63.45,111.96) v2(63.49,94.79) v2(63.53,116.25) v2(63.6,114.67) v2(63.67,120.54) v2(63.88,111.32) v2(63.88,110.56) v2(63.88,109.8) v2(63.88,109.04) v2(63.88,108.28) v2(63.88,107.51) v2(63.88,106.75) v2(63.88,105.99) v2(63.88,105.23) v2(63.88,104.47) v2(63.88,103.7) v2(63.88,102.94) v2(63.88,102.18) v2(63.88,101.42) v2(63.88,100.66) v2(64.06,122.29) v2(64.03,95.32) v2(64.29,116.25) v2(64.37,114.67) v2(64.43,120.54) v2(64.56,95.86) v2(64.82,122.29) v2(65.05,116.25) v2(65.1,96.4) v2(65.2,120.54) v2(65.13,114.67) v2(65.45,111.56) v2(65.45,110.79) v2(65.45,110.03) v2(65.45,109.27) v2(65.45,108.51) v2(65.45,107.75) v2(65.45,106.98) v2(65.45,106.22) v2(65.45,105.46) v2(65.45,104.7) v2(65.45,103.94) v2(65.45,103.17) v2(65.45,102.41) v2(65.45,98.6) v2(65.45,97.84) v2(65.45,97.08) v2(65.58,122.29) v2(65.96,120.54) v2(66.34,122.29) v2(66.72,120.54) v2(67.11,122.29) v2(67.87,122.29) v2(68.63,122.29) v2(69.77,120.54) v2(70.53,120.54) v2(71.29,120.54) v2(71.68,122.29) v2(72.05,120.54) v2(72.44,122.29) v2(72.51,118.2) v2(72.82,120.54) v2(73.05,118.74) v2(73.2,122.29) v2(73.58,120.54) v2(73.59,119.28) v2(73.95,122.43) v2(74.13,119.82) v2(74.34,120.55) v2(74.88,117.68) v2(75.17,118.39) v2(75.71,118.93) v2(76.25,119.46) v2(76.53,120.94) v2(76.53,120.18)
AIN0: length 11.5
  TOP w0.254: U3.2 76.54,73.14 v1(76.5,73.18)
  BOTTOM w0.178: 67.82,69.47 71.3,69.47 75.06,73.23 76.45,73.23 v1(76.5,73.18)
AIN2: length 63.8
  TOP w0.178: R14.1 82.7,70.1 v1(83.97,70.1) 90.5,70.1 104.5,84.11 J8.2
  TOP w0.254: R14.1 81.26,68.66 78.42,68.66 77.86,69.22 U3.3 76.57,70.57 v1(76.5,70.64)
  BOTTOM w0.178: v1(76.5,70.64) 73.38,70.64 70.94,68.2 67.03,68.2 66.55,68.68 U2.6
ALERT: length 44.6
  TOP w0.178: v1(68.99,70.87) 70.64,69.22 v1(70.64,67.01)
  TOP w0.254: U1.10 v1(56.44,83.34)
  BOTTOM w0.178: R5.2 v1(70.64,67.01) ; v1(68.99,70.87) 68.72,70.87 68.33,70.47 67.82,70.47
  BOTTOM w0.254: R5.2 69.68,64.96 66.47,61.75 59.08,61.75 58.04,62.79 58.04,81.74 v1(56.44,83.34)
BUZZ: length 29.1
  TOP w0.178: U1.6 52.11,85.94 42.96,95.09 30.06,95.09
IREMOTE: length 42.3
  TOP w0.203: R7.1 66.57,115.46 R9.1 61.32,113.96 62.51,112.74 64.33,112.74 R6.2 64.67,97.08 58.93,91.34 58.93,88.14 57.38,86.59 U1.5
LEDA1: length 65.1
  TOP w0.178: U1.11 v1(53.95,82.69)
  BOTTOM w0.178: J5.2 7.51,45.43 9.37,47.29 18.9,47.29 53.95,82.35 v1(53.95,82.69)
LEDA2: length 64.5
  TOP w0.178: v1(52.88,82.73) 53.57,82.04 U1.12
  BOTTOM w0.178: v1(52.88,82.73) 52.88,82.48 20.24,49.83 9.98,49.83 8.1,47.96 5.68,47.96
LEDB1: length 64.1
  TOP w0.178: U1.16 59.98,81.39 43.28,64.69 30.99,64.69 12.41,46.11 J6.2
LEDB2: length 63.6
  TOP w0.178: 11.21,48.64 12.37,48.64 29.72,65.99 43.82,65.99 59.86,82.04 U1.17
P1.5: length 43.5
  TOP w0.178: U1.7 13.58,85.29 12.4,86.47
P2.5: length 63
  TOP w0.178: 9.45,79.21 21.52,67.13 43.89,67.13 59.45,82.69 U1.18
RELAY: length 60
  TOP w0.254: U1.2 v1(58.19,88.54)
  BOTTOM w0.178: D3.2 98.55,76.05 79.04,95.55 65.21,95.55 v1(58.19,88.54)
RESET: length 56.3
  TOP w0.254: U1.24 61.93,86.59 v1(62.17,86.83)
  BOTTOM w0.254: v1(62.17,86.83) 61.8,87.2 58.55,87.2 57.66,88.09 57.66,91.87 76.3,110.52 86.61,110.52 92.27,116.17 93.75,116.17
RXD: length 41.3
  TOP w0.178: J3.1 23.41,106.82 26.01,104.22 36.07,104.22 52.4,87.89 U1.3
SEG_A: length 63.8
  TOP w0.178: J5.4 6.12,51.17 J6.4 ; U1.9 53.36,83.99 v1(52.07,82.7)
  BOTTOM w0.178: v1(52.07,82.7) 20.54,51.17 J6.4
SEG_B: length 63.3
  TOP w0.178: 5.19,53.01 10.03,53.01 10.72,53.7 ; v1(51.03,82.65) 53.01,84.64 U1.8
  BOTTOM w0.178: v1(51.03,82.65) 50.9,82.65 21.95,53.7 10.72,53.7
SEG_C: length 62.1
  TOP w0.178: 4.95,55.54 9.78,55.54 10.47,56.23 ; U1.13 51.23,81.39 v1(50,82.61)
  BOTTOM w0.178: v1(50,82.61) 49.84,82.61 23.45,56.23 10.47,56.23
SEG_D: length 61.6
  TOP w0.178: 4.7,58.07 9.54,58.07 10.23,58.76 ; v1(49,82.58) 50.83,80.74 U1.14
  BOTTOM w0.178: v1(49,82.58) 48.67,82.58 28.7,62.61 20.37,62.61 16.52,58.76 10.23,58.76
SEG_E: length 70.1
  TOP w0.178: 4.46,60.6 9.29,60.6 9.98,61.28
  TOP w0.254: v1(60.91,80.11) 60.91,80.19 60.97,80.24 U1.15
  BOTTOM w0.178: v1(60.91,80.11) 54.99,86.03 41.66,86.03 16.91,61.28 9.98,61.28
SEG_F: length 5.8
  TOP w0.178: J5.9 4.9,63.81 J6.9
SEG_G: length 67.3
  TOP w0.178: 9.49,66.34 8.8,65.65 3.97,65.65
  TOP w0.254: U1.20 v1(59.59,83.99)
  BOTTOM w0.178: 9.49,66.34 18.89,66.34 39.85,87.3 54.56,87.3 57.87,83.99 v1(59.59,83.99)
SEG_H: length 70.1
  TOP w0.178: U1.19 61.87,83.34 62.05,83.52 62.05,84.46 61.87,84.64 U1.21 v1(59.58,84.64) ; J5.11 8.56,68.18 J6.11
  BOTTOM w0.178: v1(59.58,84.64) 58.31,84.64 54.97,87.99 37.74,87.99 18.63,68.87 J6.11
TEST: length 54.8
  TOP w0.254: U1.25 60.21,87.24 59.69,86.72 v1(59.69,86.59)
  BOTTOM w0.254: J1.2 86.38,112.29 76.5,112.29 56.87,92.66 56.87,87.83 58.12,86.59 v1(59.69,86.59)
TXD: length 41.7
  TOP w0.178: J3.2 23.16,106.51 25.89,103.78 35.86,103.78 52.41,87.24 U1.4
XIN: length 13.4
  TOP w0.178: U1.27 66.9,88.54 68.87,90.51 Y1.1 70.99,91.5 C7.1
XOUT: length 16.4
  TOP w0.178: C2.1 70.76,82 Y1.2 68.87,85.89 66.87,87.89 U1.26
N01192: length 4.7
  TOP w0.178: R1.2 52.76,113.53 52.76,115.06 53.26,115.56 SW1.1
  TOP w0.254: R1.2 52.58,113.21 C5.2
N01643: length 18.5
  TOP w0.254: U1.23 v1(62.43,85.94)
  BOTTOM w0.178: 66.56,70.98 66.5,71.04 66.5,72.34 66.91,72.75 66.91,74.7 64.92,76.68 64.92,83.45 v1(62.43,85.94)
N01661: length 20.1
  TOP w0.254: v1(63.3,85.88) 62.71,85.29 U1.22
  BOTTOM w0.178: v1(63.3,85.88) 63.45,85.88 65.63,83.69 65.63,77.22 68.47,74.38 R3.2 68.47,72.87 67.19,71.59 67.19,71.09
N04825: length 41.7
  TOP w0.381: C8.1 72.39,116.81 R4.2 75.65,120.1 IC2.1 74.17,121.41 47,121.41 45.79,122.62
N04873: length 9.3
  TOP w0.203: v1(66.55,118.11) 66.55,117.12 R7.2
  BOTTOM w0.203: v1(66.55,118.11) 66.55,118.87 70.85,123.17 IC2.3
N04910: length 21.3
  TOP w0.203: R9.2 59.55,118.87 42.66,118.87 41.31,120.23
N06312: length 3.4
  TOP w0.178: J7.2 114.83,92.97 113.83,91.38
N09730: length 9
  TOP w0.178: D1.1 10.07,83.78 11.55,82.3 14.77,82.3
N09734: length 8.1
  TOP w0.178: R10.1 13.03,81.28 8.18,81.28 7.11,80.21
N11094: length 9.3
  TOP w0.178: LS2.1 18.73,93.66 R11.2
N11141: length 9.5
  TOP w0.178: 19.13,100.8 24.49,100.8 Q1.2
N11148: length 3.5
  TOP w0.178: Q1.1 27.45,95.45 R15.2
N12424: length 4.4
  TOP w0.254: D3.1 98.58,67.72 100.23,66.07 102.15,66.07 R16.1
N12443: length 4.1
  TOP w0.254: Q2.1 107.29,66.14 R16.2
N12670: length 43.3
  TOP w0.178: 112.59,69.26 107.8,69.26 Q2.2 109.83,67.17 109.83,61.54 109.55,61.26 90.88,61.26 89.36,59.74 LS1.2
N12674: length 30.6
  TOP w0.178: 112.98,79.41 108.75,79.41 107.03,77.69 103.8,77.69 89.16,63.05
N12827: length 5.8
  BOTTOM w0.254: 123.77,66.42 123.26,66.92 123.26,72.03
N12831: length 56.8
  TOP w0.178: LS1.4 85.65,62.84 104.62,81.81 115.56,81.81 122.84,74.54
N12862: length 35.7
  TOP w0.178: J4.2 117.29,57.08 LS1.3
N19176: length 8.5
  TOP w0.381: 18.97,35.98 19.9,36.07 ; 19.9,36.07 20.84,36.17 ; 19.9,36.07 19.8,37.01 ; 26.51,38.11 D5.2 ; D5.2 27.94,39.54 ; D5.2 29.37,38.11 ; D5.2 27.94,36.68
N19183: length 9.5
  TOP w0.381: 20.17,33.55 20.17,34.49 ; 20.17,33.55 21.1,33.55 ; 20.17,33.55 20.17,32.61 ; 20.17,33.55 19.23,33.55 ; D5.3 27.94,34.44 ; D5.3 27.94,31.58 ; D5.3 26.51,33.01 ; D5.3 29.37,33.01
N19215: length 9
  TOP w0.178: F1.1 36.83,40.81 ; F1.1 38.01,39.62 ; F1.1 36.83,38.44 ; F1.1 35.65,39.62 ; 26.51,43.21 D5.1 ; D5.1 27.94,44.64 ; D5.1 29.37,43.21
N21283: length 33.6
  TOP w0.178: C16.1 74.93,41.25 ; C16.1 73.75,40.07 ; C16.1 74.93,38.89 ; C16.1 74.48,39.62 F1.2 ; C16.1 86.11,40.07 R17.1 ; 86.05,39.37 R17.1 ; R17.1 86.81,38.44 ; R17.1 86.81,40.3 ; F1.2 62.23,40.81 ; F1.2 62.23,38.44
N21515: length 38.1
  TOP w0.178: 67.98,20.14 C10.1 ; C10.1 68.71,18.73 66.5,16.52 ; C10.1 69.11,20.47 ; C10.1 76.15,27.18 Q3.1 ; C10.1 68.31,19.01 ; 63.96,12.05 63.96,13.98 66.5,16.52 ; 66.5,16.52 66.9,17.14 ; 66.5,16.52 66.1,15.91 ; 66.5,16.52 65.82,16.96 ; 85.03,26.2 Q3.1 ; Q3.1 85.03,28.16 ; 64.52,13.46 63.83,12.5 62.87,13.2

## Copper pours and planes (outline as drawn; the poured copper is in the pictures)
+3.3V on TOP: 84.95,14.3 84.57,14.3 79.8,9.52 79.8,9.24 80.63,8.4 81.6,8.4 82.46,7.54 83.68,7.54 84.14,8 84.14,9.39 85.46,10.71 85.46,11.98 86.43,12.95 86.43,14.02 85.94,14.5 85.08,14.5 84.95,14.37
+3.3V on TOP: 49.02,16.83 48.64,16.83 43.86,12.05 43.86,11.78 44.7,10.94 45.67,10.94 46.53,10.07 47.75,10.07 48.21,10.53 48.21,11.93 49.53,13.25 49.53,14.52 50.49,15.48 50.49,16.55 50.01,17.03 49.15,17.03 49.02,16.91
+3.3V on TOP: 54.43,95.33 54.43,89.33 54.74,89.03 56.16,89.03 56.29,89.15 56.29,95.02 55.85,95.45 54.56,95.45
+3.3V on TOP: 48.87,16.79 48.49,16.79 43.71,12.01 43.71,11.73 44.55,10.9 45.52,10.9 46.38,10.03 47.6,10.03 48.06,10.49 48.06,11.89 49.38,13.21 49.38,14.48 50.34,15.44 50.34,16.51 49.86,16.99 49,16.99 48.87,16.87
+3.3V on L3_SIG1-PWR: 42.24,5.89 40.08,8.05 40.08,26.34 44.57,30.83 44.57,90.78 44.55,90.81 44.55,94.82 44.58,94.84 44.58,109.32 52.5,117.25 80.85,117.25 83.57,119.96 89.56,119.96 90.83,118.69 90.83,100.61 82.36,92.14 82.65,91.85 82.65,40.56 73.67,31.58 73.76,31.5 73.76,12.14 83.46,12.14 86.77,8.84 86.77,6.3 86.36,5.89 ; 1 cut-out
+5V on TOP: 103.23,37.74 102.82,38.15 102.82,42.23 102.79,42.24 102.82,42.27 102.79,46.71 103.94,47.5 105.28,47.42 105.79,43.97 105.59,42.42 105.56,42.41 105.56,38.53 104.78,37.74
+5V on L3_SIG1-PWR: 102.74,98.27 102.74,43.71 103.05,43.41 105.94,43.41 106.4,43.87 106.4,53.77 111.66,59.03 111.66,100.58 112.57,101.5 112.57,102.24 111.76,103.05 107.52,103.05
+12V on TOP: 67.82,8.86 67.82,10.58 68.57,10.58 82.59,24.59 87.63,24.59 89.68,26.64 89.68,27.63 90.41,28.35 92.07,28.35 92.89,27.54 92.89,24.2 87.76,19.08 87.76,17.63 84.71,14.58 84.13,14.58 82.95,13.4 75.63,13.4 71.08,8.86
+12V on L4_SIG2-PWR: 27.74,18.85 84.2,18.85 89.64,24.28 92.71,24.28 113.92,45.49 113.92,83.82 103.4,94.34 21.41,94.34 8.99,81.92 8.99,46.56 6.38,43.94 4.55,43.94 4.55,42.04
+18V on TOP: 31.72,15.65 35.28,15.65 44.15,24.51 53.77,24.51 54.18,24.1 54.18,22.66 52.5,20.98 52.48,20.98 52.07,20.57 52.07,19.28 50.11,17.32 48.16,17.32 44.17,13.34 31.27,13.34 31.27,15.19
+18V on BOTTOM: 48.16,22.68 52.76,16 77.27,16.56 104.83,22.5 119.2,38.58 125.53,61.37 121.16,86.82 110.72,104.72 106.98,105.59 102.49,94.77 99.31,56.39 90.12,45.85 76.53,41.63 53.92,33.78 48.18,22.73
+26V on TOP: 26.16,17.02 24.64,18.54 24.64,19 28.37,22.73 31.29,22.73 45.44,36.88 87.07,36.88 87.86,37.67 87.91,37.67 87.91,40.29 88.47,40.85 98.34,40.85 99.71,39.48 99.71,34.95 95.69,30.93 90.86,30.93 88.51,28.58 88.51,26.7 88.14,26.33 87.84,26.33 87.67,26.5 87.45,26.5 87.44,26.49 87.14,26.49 86.5,27.13 86.5,28.52 86.06,28.52 84.15,30.43 75.03,30.43 70.76,26.16 40.08,26.16 38.28,24.36 38.28,23.55 33.91,19.18 30.61,19.18 28.45,17.02
GND on TOP: 29.54,16.41 29.54,16.84 31.52,18.82 34.62,18.82 37.87,22.07 37.87,22.5 38.84,23.47 39.07,23.47 40.16,22.38 40.16,21.16 35.43,16.43 32.08,16.43 30.96,15.32 29.31,15.32 29.31,16.18
GND on TOP: 42.7,10.49 42.7,9.86 44.58,7.98 48.59,7.98 55.58,14.96 55.58,21.67 55.3,21.95 53.95,21.95 52.22,20.22 52.22,18.97 51.33,18.08 51.31,18.08 50.67,17.45 50.67,15.47 49.78,14.58 49.78,13.06 48.31,11.58 48.31,10.21 47.68,9.58 46.23,9.58 45.19,10.62 44.22,10.62 43.43,11.4 42.65,11.4 42.09,10.85 42.44,10.49
GND on TOP: 65.75,10.49 65.75,14.74 66.5,15.49 67.25,15.49 69.56,17.8 69.56,19.15 70.28,19.87 70.97,19.87 71.96,18.88 71.96,17.83 67.3,13.17 67.3,10.84 66.77,10.31 65.93,10.31
GND on TOP: 100.53,38.84 100.28,44.58 101.4,45.29 102.39,44.81 102.46,37.54 101.09,36.27 100.28,36.42 100.18,38.33
GND on TOP, BOTTOM, L2_GND, L3_SIG1-PWR, L4_SIG2-PWR, L5_GND: 63.5,0.51 63.5,126.49
N19176 on TOP: 19.56,35.56 12.45,35.56 11.68,36.32 11.68,40.39 12.45,41.15 27.69,41.15 30.48,38.35 30.48,35.31 19.81,35.31
N19183 on TOP: 12.7,34.8 29.97,34.8 30.48,34.29 30.48,30.73 29.21,29.46 15.75,29.46 12.19,33.02 12.19,34.29
N19215 on TOP: 28.96,41.91 23.62,41.91 21.84,43.69 21.84,48.01 22.1,48.26 36.07,48.26 39.62,44.7 39.62,38.86 39.12,38.35 32.51,38.35
N21283 on TOP: 61.01,40.97 61.01,38.46 61.39,38.07 86.94,38.07 87.2,38.33 87.2,40.61 85.93,41.88 61.93,41.88
N21515 on TOP: 64.16,11.1 63.4,11.1 60.83,13.67 60.83,14.31 76.26,29.74 83.95,29.74 85.83,27.86 85.83,26.09 85.59,25.84 75.48,25.84 69.14,19.5 69.14,18.69 67.22,16.77 67.18,16.77 65.27,14.86 65.27,12.21

## Text on the board
Ref Des/Silkscreen Top: test 26v | test 5v | test 12v | test 18v | test pin3.3
HOANG: .04 | power | sensor | display port | fiducial
